# Altium PCB CH585D-DG-R0-1v0.PcbDoc
Units mil, origin at the board's own origin, x right, y up, seen from the top; angles counter-clockwise.
Board outline 452.76 x 645.67 mil, 2 copper layers (Top Layer, Bottom Layer); 10 components, 20 nets, 49 pads, 45 vias.
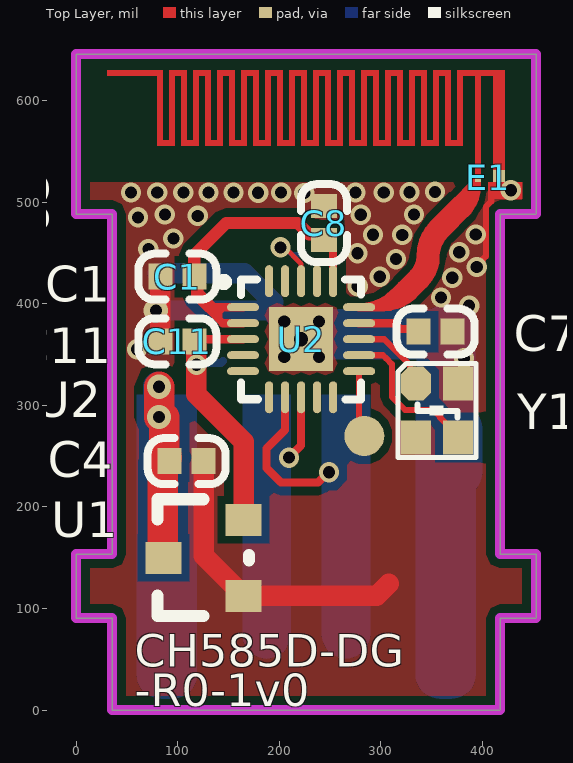
[diagram p0: Top Layer view]
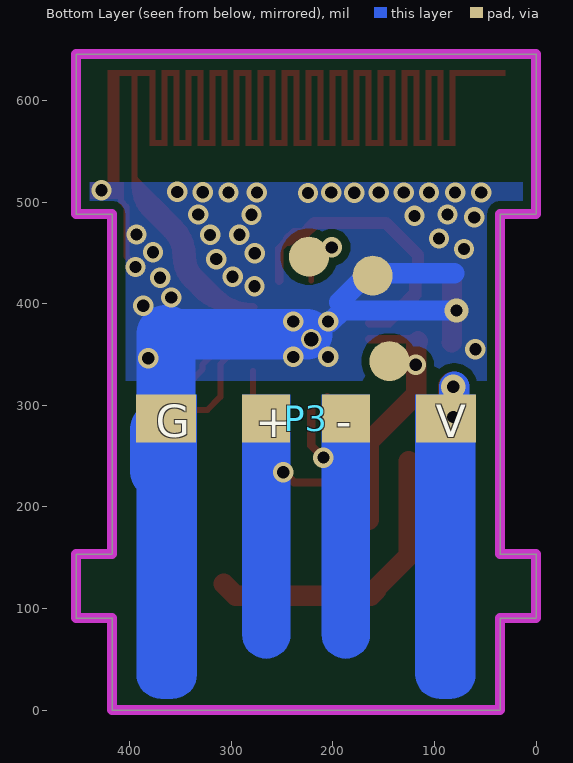
[diagram p1: Bottom Layer view, seen from below]

## Layer stack, top to bottom
Top Solder: solder mask 0.4, Solder Resist, Dk 3.5
Top Layer: signal copper 1.4
Dielectric 1: dielectric 12.6, FR-4, Dk 4.8
Bottom Layer: signal copper 1.4
Bottom Solder: solder mask 0.4, Solder Resist, Dk 3.5

## Board outline
35.43,0 35.43,90.55 0,90.55 0,153.54 35.43,153.54 35.43,488.19 0,488.19 0,645.67 452.76,645.67 452.76,488.19 417.32,488.19 417.32,153.54 452.76,153.54 452.76,90.55 417.32,90.55 417.32,0

## Design rules (kind name [scope] priority, off if disabled: settings)
Clearance Clearance_2 [InNet('ANT')] p1: gap=6 ignorepadtopadclearanceinfootprint=FALSE
Clearance Clearance_1 [InPolygon] p2: gap=8 ignorepadtopadclearanceinfootprint=FALSE except(6: Arc-Arc Arc-Track Track-Track)
Clearance [All] p3: gap=6 ignorepadtopadclearanceinfootprint=FALSE except(8: Arc-Via Track-Via SMDPad-Via THPad-Via Via-Via Via-Fill Via-Poly Via-Region Via-Hole)
ComponentClearance [All] p1 off: gap=10 collisioncheckmode=3 verticalgap=10 showdistances=FALSE
DiffPairsRouting [All] p1: maxlimit=10 minlimit=7 mostfreqgap=8 toplayer_minwidth=6 toplayer_maxwidth=15 toplayer_prefwidth=8 bottomlayer_minwidth=6 bottomlayer_maxwidth=15 bottomlayer_prefwidth=8 maxuncoupledlength=500
MinimumSolderMaskSliver [All] p1 off: minsoldermaskwidth=10
PolygonConnect [All] p1: connectstyle=Direct reliefconductorwidth=20 reliefentries=4 polygonreliefangle="90 Angle" airgapwidth=10
RoutingVias [All] p1: holewidth=16 width=28 viastyle="Through Hole" minholewidth=12 minwidth=20 maxholewidth=28 maxwidth=50
SilkToSilkClearance [All] p1 off: silktosilkclearance=10
SilkToSolderMaskClearance [IsPad] p1 off: minsilkscreentomaskgap=10 clearancetoexposedcopper=TRUE
SolderMaskExpansion [All] p1: expansion=2 istentingtop=FALSE
Width [All] p1: maxlimit=100 minlimit=5 preferedwidth=10
25 further rules are at their usual default settings.

## Components (designator, comment, footprint, x,y, rotation, side; value= is the part's Value field where it differs from the comment)
C1 "1uF" 0402_C 82.83,426.61 r90 top
C4 "2.2uF" 0402_C 125.43,245 r270 top value=100pF
C7 "1uF" 0402_C 337.15,372.48 r90 top
C8 "0.1uF" 0402_C 243.71,462.65 r180 top
C11 "2.2uF" 0402_C 82.83,363.08 r90 top
E1 "ANTENNA" ANT-F-1-2.4G-0.8mmFR4 395.43,522.64 r180 top
P3 "USB" USBAM-4P 226.38,287.22 r180 bottom
U1 "6219P33M" SOT-23 125.43,150 r90 top
U2 "CH585D" QFN20_3X3 221.37,365.09 r270 top
Y1 "32MHz" XT2016 334.58,321.45 r270 top

## Footprints (in the part's own frame and the unit in brackets; to place one, negate y for a bottom-side part, rotate by r counter-clockwise, add the part's x,y. Pads: shape width x height; smd on the part's side, far side on the other; paste and mask are expansions set on the pad)
0402_C [mm]
  rect 0.65x0.6 smd mask+0.051: 1(0,0) 2(0,-0.85)
  silkscreen extent -0.58,-1.4 0.57,0.55
ANT-F-1-2.4G-0.8mmFR4 [mm]
  rect 0.3x0.3 smd mask+0: 0(-0.525,-0.075)
  rect 0.15x0.15 smd mask+0: 1(0,0)
  Top Layer region: 7.875,-2.725 8.025,-2.725 8.025,-0.825 7.875,-0.825
  Top Layer region: 7.875,-2.725 9.275,-2.725 9.275,-2.575 7.875,-2.575
  Top Layer region: 7.575,-0.975 8.025,-0.975 8.025,-0.825 7.575,-0.825
  Top Layer region: 6.675,-2.725 6.825,-2.725 6.825,-0.825 6.675,-0.825
  Top Layer region: 6.975,-2.725 7.125,-2.725 7.125,-0.825 6.975,-0.825
  Top Layer region: 7.275,-2.725 7.425,-2.725 7.425,-0.825 7.275,-0.825
  Top Layer region: 7.575,-2.725 7.725,-2.725 7.725,-0.825 7.575,-0.825
  Top Layer region: 6.675,-2.725 7.125,-2.725 7.125,-2.575 6.675,-2.575
  Top Layer region: 7.275,-2.725 7.725,-2.725 7.725,-2.575 7.275,-2.575
  Top Layer region: 6.375,-0.975 6.825,-0.975 6.825,-0.825 6.375,-0.825
  Top Layer region: 6.975,-0.975 7.425,-0.975 7.425,-0.825 6.975,-0.825
  Top Layer region: 5.475,-2.725 5.625,-2.725 5.625,-0.825 5.475,-0.825
  Top Layer region: 5.775,-2.725 5.925,-2.725 5.925,-0.825 5.775,-0.825
  Top Layer region: 6.075,-2.725 6.225,-2.725 6.225,-0.825 6.075,-0.825
  Top Layer region: 6.375,-2.725 6.525,-2.725 6.525,-0.825 6.375,-0.825
  Top Layer region: 5.475,-2.725 5.925,-2.725 5.925,-2.575 5.475,-2.575
  Top Layer region: 6.075,-2.725 6.525,-2.725 6.525,-2.575 6.075,-2.575
  Top Layer region: 5.175,-0.975 5.625,-0.975 5.625,-0.825 5.175,-0.825
  Top Layer region: 5.775,-0.975 6.225,-0.975 6.225,-0.825 5.775,-0.825
  Top Layer region: 4.275,-2.725 4.425,-2.725 4.425,-0.825 4.275,-0.825
  Top Layer region: 4.575,-2.725 4.725,-2.725 4.725,-0.825 4.575,-0.825
  Top Layer region: 4.875,-2.725 5.025,-2.725 5.025,-0.825 4.875,-0.825
  Top Layer region: 5.175,-2.725 5.325,-2.725 5.325,-0.825 5.175,-0.825
  Top Layer region: 4.275,-2.725 4.725,-2.725 4.725,-2.575 4.275,-2.575
  Top Layer region: 4.875,-2.725 5.325,-2.725 5.325,-2.575 4.875,-2.575
  Top Layer region: 3.975,-0.975 4.425,-0.975 4.425,-0.825 3.975,-0.825
  Top Layer region: 4.575,-0.975 5.025,-0.975 5.025,-0.825 4.575,-0.825
  Top Layer region: 3.075,-2.725 3.225,-2.725 3.225,-0.825 3.075,-0.825
  Top Layer region: 3.375,-2.725 3.525,-2.725 3.525,-0.825 3.375,-0.825
  Top Layer region: 3.675,-2.725 3.825,-2.725 3.825,-0.825 3.675,-0.825
  Top Layer region: 3.975,-2.725 4.125,-2.725 4.125,-0.825 3.975,-0.825
  Top Layer region: 3.075,-2.725 3.525,-2.725 3.525,-2.575 3.075,-2.575
  Top Layer region: 3.675,-2.725 4.125,-2.725 4.125,-2.575 3.675,-2.575
  Top Layer region: 2.775,-0.975 3.225,-0.975 3.225,-0.825 2.775,-0.825
  Top Layer region: 3.375,-0.975 3.825,-0.975 3.825,-0.825 3.375,-0.825
  Top Layer region: 1.875,-2.725 2.025,-2.725 2.025,-0.825 1.875,-0.825
  Top Layer region: 2.175,-2.725 2.325,-2.725 2.325,-0.825 2.175,-0.825
  Top Layer region: 2.475,-2.725 2.625,-2.725 2.625,-0.825 2.475,-0.825
  Top Layer region: 2.775,-2.725 2.925,-2.725 2.925,-0.825 2.775,-0.825
  Top Layer region: 1.875,-2.725 2.325,-2.725 2.325,-2.575 1.875,-2.575
  Top Layer region: 2.475,-2.725 2.925,-2.725 2.925,-2.575 2.475,-2.575
  Top Layer region: 1.575,-0.975 2.025,-0.975 2.025,-0.825 1.575,-0.825
  Top Layer region: 2.175,-0.975 2.625,-0.975 2.625,-0.825 2.175,-0.825
  Top Layer region: 0.975,-0.975 1.425,-0.975 1.425,-0.825 0.975,-0.825
  Top Layer region: 0.375,-0.975 0.825,-0.975 0.825,-0.825 0.375,-0.825
  Top Layer region: 1.275,-2.725 1.725,-2.725 1.725,-2.575 1.275,-2.575
  Top Layer region: 0.675,-2.725 1.125,-2.725 1.125,-2.575 0.675,-2.575
  Top Layer region: 0.075,-2.725 0.525,-2.725 0.525,-2.575 0.075,-2.575
  Top Layer region: 1.575,-2.725 1.725,-2.725 1.725,-0.825 1.575,-0.825
  Top Layer region: 1.275,-2.725 1.425,-2.725 1.425,-0.825 1.275,-0.825
  Top Layer region: 0.975,-2.725 1.125,-2.725 1.125,-0.825 0.975,-0.825
  Top Layer region: 0.675,-2.725 0.825,-2.725 0.825,-0.825 0.675,-0.825
  Top Layer region: 0.375,-2.725 0.525,-2.725 0.525,-0.825 0.375,-0.825
  Top Layer region: -0.675,-2.576 -0.675,-2.726 0.075,-2.726 0.075,-2.576
  Top Layer region: -0.075,-2.725 0.075,-2.725 0.075,0.075 -0.075,0.075
  Top Layer region: -0.675,-2.725 -0.375,-2.725 -0.375,0.075 -0.675,0.075
QFN20_3X3 [mm]
  rect 1.6x1.6 smd mask+0.051: 0(0,0)
  round 0.508 hole 0.356: 0(0,0)
  oval 0.2x0.8 smd mask+0.051: 1(-0.8,-1.451) 2(-0.4,-1.451) 3(0,-1.451) 4(0.4,-1.451) 5(0.8,-1.451) 11(0.8,1.451) 12(0.4,1.451) 13(0,1.451) 14(-0.4,1.451) 15(-0.8,1.451)
  oval 0.8x0.2 smd mask+0.051: 6(1.451,-0.8) 7(1.451,-0.4) 8(1.451,0) 9(1.451,0.4) 10(1.451,0.8) 16(-1.451,0.8) 17(-1.451,0.4) 18(-1.451,0) 19(-1.451,-0.4) 20(-1.451,-0.8)
  silkscreen extent -1.53,-2.03 1.5,1.5
SOT-23 [mm]
  rect 0.8x0.9 smd: 1(-0.95,-1) 2(0.95,-1) 3(0,1)
  silkscreen extent -1.46,-1.14 1.46,1.15
USBAM-4P [mm]
  rect 1.5x1.2 smd: 1(3.5,0) 4(-3.5,0)
  rect 1.2x1.2 smd: 2(1,0) 3(-1,0)
  Top Layer region: 3.331,-7.006 3.102,-6.959 2.907,-6.829 2.778,-6.634 2.733,-6.404 2.733,-6.404 2.733,-6.404 2.733,0.594 4.233,0.594 4.233,-6.404 4.233,-6.404 4.188,-6.634 4.058,-6.829 3.864,-6.959 3.634,-7.006 3.634,-7.006
  Top Layer region: 0.989,-6.006 0.759,-5.959 0.565,-5.829 0.436,-5.634 0.39,-5.404 0.39,-5.404 0.39,-5.404 0.39,0.594 1.591,0.594 1.591,-5.404 1.591,-5.404 1.546,-5.634 1.416,-5.829 1.222,-5.959 0.992,-6.006
  Top Layer region: -3.639,-7.006 -3.868,-6.959 -4.062,-6.829 -4.192,-6.634 -4.237,-6.404 -4.237,-6.404 -4.237,-6.404 -4.237,0.594 -2.737,0.594 -2.737,-6.404 -2.737,-6.404 -2.782,-6.634 -2.911,-6.829 -3.106,-6.959 -3.335,-7.006 -3.335,-7.006
  Top Layer region: -0.998,-6.006 -1.227,-5.959 -1.422,-5.829 -1.551,-5.634 -1.596,-5.404 -1.596,-5.404 -1.596,-5.404 -1.596,0.594 -0.396,0.594 -0.396,-5.404 -0.396,-5.404 -0.441,-5.634 -0.571,-5.829 -0.765,-5.959 -0.995,-6.006
XT2016 [mm]
  oct 0.85x0.75 smd mask+0.051: 1(0,0)
  rect 0.85x0.75 smd mask+0.051: 2(1.35,0) 3(1.35,1.05) 4(0,1.05)
  silkscreen extent -0.5,-0.45 1.85,1.5

## Part data
C1 C7 C8 C11: library part CAP, "Capacitor"
C4: library part Cap, "Capacitor", LatestRevisionDate=17-Jul-2002, LatestRevisionNote="Re-released for DXP Platform.", PackageReference=RAD-0.3, Published=8-Jun-2000, Publisher="Altium Limited"
E1: "Generic Antenna"
U2: "RISC-V MCU with BLE/HSUSB/USB/ADC/PWM/SPI/2*UART"
Y1: library part 晶体

## Free pads (board coordinates)
  round 39.37 smd far side mask+2: 1(144.39,343.49) 1(160.94,427.61) 1(223.57,446.33)
  round 39.37 smd mask+2: 1(283.6,269.9)

## Via types
v1: diameter 20, hole 12, Top Layer to Bottom Layer, tented both sides, 42 vias
v2: diameter 24, hole 12, Top Layer to Bottom Layer, tented both sides, 3 vias

## Nets (pads, with @x,y where several pads share a name; then routed paths per layer and width w, separated by ;. In a path a pad name is that pad's centre, name@x,y a point inside that pad or via, vN(x,y) a via of type N, cw(c..) or ccw(c..) an arc to the next point about the centre after c; other vN are vias at no path point)
+3V3: C11.2 pad.1@144.39,343.49 U1.2 U2.3 | length 264.3
  Top Layer w8: C11.2@122.11,366.45 123.47,365.09 U2.3
  Top Layer w20: C11.2 118.11,361.27 118.11,310.88 164.8,264.19 U1.2
  Bottom Layer w8: v1@120.05,339.96 121.81,341.72 142.62,341.72 pad.1@144.39,343.49
  other v1: 118.48,339.96
+5V: C4.2 P3.1 U1.3 | length 214.4
  Top Layer w30: v2(81.57,288.53) v2(81.57,318.36) ; U1.3@85.43,160 85.43,245 C4.2@86.68,246.24 ; C4.2@86.68,242.99 C4.2@86.68,246.24 ; v2@86.68,288.53 C4.2@86.68,246.24 ; C4.2@89.19,248.76 C4.2@86.68,246.24
  Bottom Layer w30: P3.1@80.68,295.84 v2@80.68,318.36 ; v2(81.57,288.53) 75.68,294.42 75.68,295.84 84.31,287.22 P3.1
ANT: E1.1 U2.15 | length 429.3
  Top Layer w6: 369.44,497.52 E1.1@394.45,522.53 ; 369.89,497.63 370.42,497.63 E1.1 ; 376.63,500.08 376.63,500.29 392.93,516.6 ccw(c386.89,522.64) E1.1 ; 380.1,496.33 387.67,503.89 ccw(c368.92,522.64) E1.1 ; 383.62,487.92 ccw(c355.12,516.42) 395.43,516.42 E1.1
  Top Layer w8: 320,417.99 312.8,410.79 cw(c278.5,445.09) U2.15 U2.15@286.28,396.58 ; 325.45,412.81 cw(c286.28,451.99) 299.69,398.23 ; 332.19,408.93 cw(c302.39,438.73) 302.39,396.58 U2.15@293.23,396.58 ; U2.15@286.28,396.58 ccw(c286.28,451.99) 299.69,398.23 ; U2.15@286.28,396.58 U2.15@293.23,396.58 ; U2.15@293.23,396.58 ccw(c293.23,410.05) 299.69,398.23
  Top Layer w22.9: 325.45,412.81 337.21,424.57 ccw(c315.22,446.56) 346.32,446.56 cw(c384.91,446.56) 357.62,473.85 380.1,496.33
GND: C1.1 C4.1 C7.2 C8.2 C11.1 E1.0 P3.4 pad.1@160.94,427.61 U1.1 U2.0 Y1.2 Y1.4 | length 999.4
  Top Layer w6: v1(394.32,436.24) 394.32,437.76 403.32,446.76 403.32,495.54 408.52,500.74 408.52,506.07 410.78,508.32 416.1,508.32 E1.0
  Top Layer w20: v2(78.43,393.35) 81.26,393.35 v2@82.83,391.78 ; C1.1 v2@82.83,391.78 ; C11.1@83.14,361.94 82.83,362.25 C11.1 v2@82.83,391.78 ; C4.1 125.43,151.97 157.09,120.32 157.09,118.35 162.83,112.6 295.85,112.6 307.57,124.31
  Bottom Layer w20: v2(78.43,393.35) 191.1,393.35 v1@202.88,381.57 ; 80.43,430 165.43,430 193.94,401.5
  Bottom Layer w50: U2.0@225.43,370 364.17,370
  Bottom Layer w58: 364.17,370 364.17,282.37 370.94,275.6 370.94,235.63
  other v1: 381.81,346.44 204.74,347.69 239.04,347.69 59.83,355.25 204.74,382.49 239.04,382.49 386.79,397.99 359.14,406.11 277.18,417.32 370.1,425.56 298.73,426.55 314.89,443.94 276.97,449.78 377.15,450.68 71.11,453.86 95.69,464.16 292.11,467.95 320.89,467.8 393.36,468.09 60.92,485 119.71,486.5 87.31,487.91 280.09,487.54 332.59,487.81 179.07,509.19 224.52,509.03 54.04,509.51 79.77,509.51 105.51,509.51 130.32,509.51 154.91,509.51 201.76,509.51 274.89,509.51 302.79,509.53 328.12,509.66 353.19,510.15 427.86,511.73
PA9: U2.4
PA12: U2.20
PA13: U2.19
PA14: pad.1@223.57,446.33 U2.18 | length 65.4
  Top Layer w5: v1(201.13,455.51) 205.19,455.51 221.37,439.34 U2.18
  Bottom Layer w5: v1(201.13,455.51) 204,452.64 208.06,452.64 212.44,448.27 pad.1@219.51,448.27
PA15: U2.17
PB10: U2.10
PB11: U2.9
PB12: P3.2 U2.8 | length 52.6
  Top Layer w8: v1(209.41,248.55) 221.37,260.51 U2.8@221.37,296.21
PB13: P3.3 U2.7 | length 148.9
  Top Layer w8: U2.7 205.62,275.88 187.41,257.67 187.41,238.33 201.78,223.96 238.22,223.96 248.45,234.19 v1(248.91,234.19)
PB14: U2.6
PB15: U2.5
PB22: pad.1@283.6,269.9 U2.11 | length 68.3
  Top Layer w6: pad.1@278.5,265.34 U2.11
VDCIA: C1.2 C8.1 U2.1 U2.2 U2.16 | length 365.4
  Top Layer w8: C1.2@116.87,420.6 116.87,408.21 144.24,380.84 U2.2 ; C1.2@121.11,425.04 121.11,411.4 135.92,396.59 ; 140.17,386.31 140.17,392.33 135.92,396.59 ; 140.98,393.14 144.43,396.59 ; 146.19,396.59 144.43,396.59 ; U2.1 144.43,396.59 ; C8.1@245.21,462.13 252.87,454.48 U2.16 ; 135.92,396.59 144.43,396.59
  Top Layer w12: C1.2@116.3,425.85 116.3,448.1 147.71,479.51 218.19,479.51 229.24,468.47 237.9,468.47 C8.1
VINTA: C7.1 U2.14 | length 69
  Top Layer w8: U2.14 313.04,380.83 318.65,375.23 335.95,375.23 C7.1@342.45,368.74
X32MI: U2.13 Y1.1 | length 76.4
  Top Layer w6: U2.13 303.22,365.09 328.44,339.87 328.44,335.1 Y1.1@336.38,327.16
X32MO: U2.12 Y1.3 | length 144.8
  Top Layer w6: U2.12 301.99,349.34 305.17,346.16 310.81,340.52 310.81,308.31 323.7,295.43 351.67,295.43 358.34,288.76 358.34,287.84 372.15,274.03 Y1.3@372.73,274.03

## Polygon pours and split planes (outlines as drawn)
GND on Bottom Layer "GND" (solid, remove dead copper, pour order 1): 0,528.38 0,324.17 452.76,324.17 452.76,528.38
GND on Top Layer "GND" (solid, remove dead copper, pour order 0): 0,529.65 452.76,529.65 452.76,0 0,0

## Keep-outs
Keep-Out Layer:
  the board outline again, w10

## Other copper
Top Layer:
  rectangle net GND: 405.52,503.07 439.13,519.69
Multi-Layer:
  pour cut-out: 452.76,519.69 0,519.69 0,645.67 452.76,645.67

## Silkscreen, mask and mechanical layers (free items; w line width, h text height)
Top Overlay:
  text "CH585D-DG" at 57.51,42.83 h32
  text "-R0-1v0" at 57.51,3.74 h32
Mechanical 1:
  the board outline again, w10

## Text inside footprints (layer, text, board x,y; h text height)
P3: Bottom Overlay "V" at 98.78,268.56 h32; Bottom Overlay "-" at 197.02,268.56 h32; Bottom Overlay "+" at 276.38,268.56 h32; Bottom Overlay "G" at 374.41,268.56 h32